# Altium PCB PCB1.PcbDoc
Units mil, origin at the board's own origin, x right, y up, seen from the top; angles counter-clockwise.
Board outline 6000 x 4000 mil, 4 copper layers (Top Layer, Layer 1, Layer 2, Bottom Layer), stack 23.756 mil thick; 9 components, 27 nets, 110 pads, 0 vias.
Unrouted connection lines stored in the file: 64.
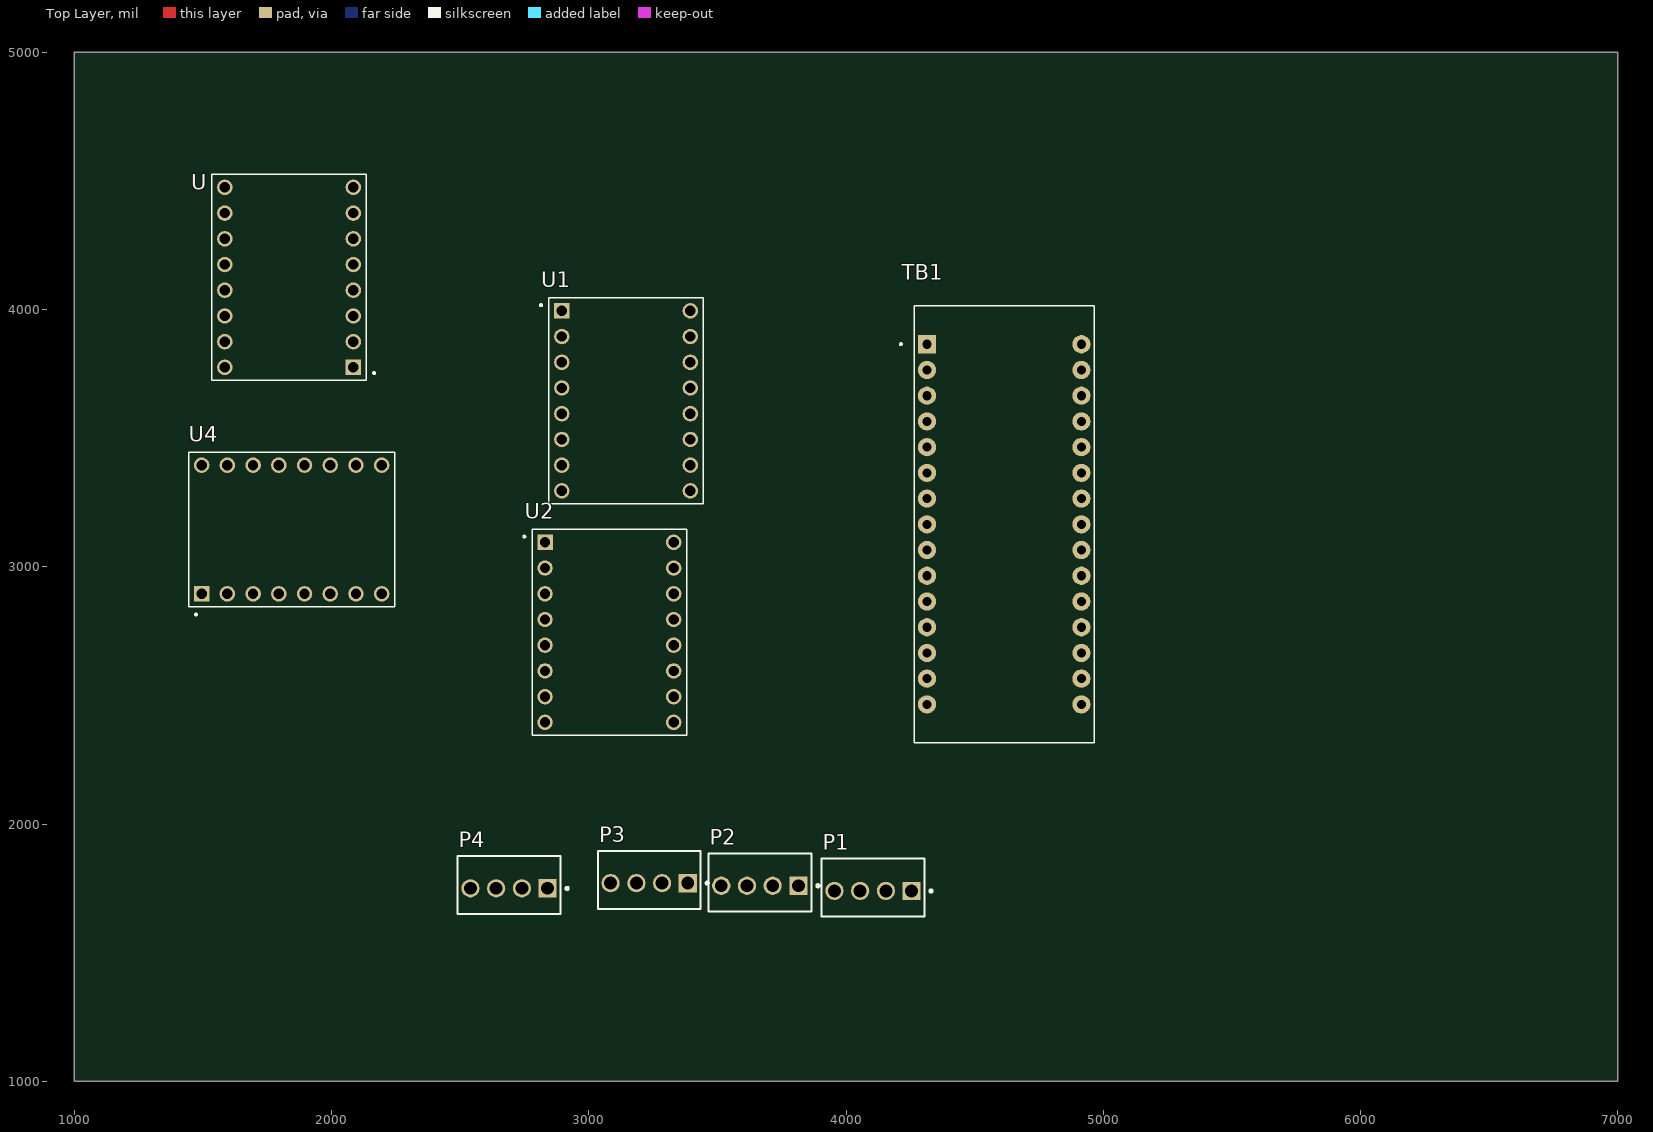
[diagram p0: Top Layer view]
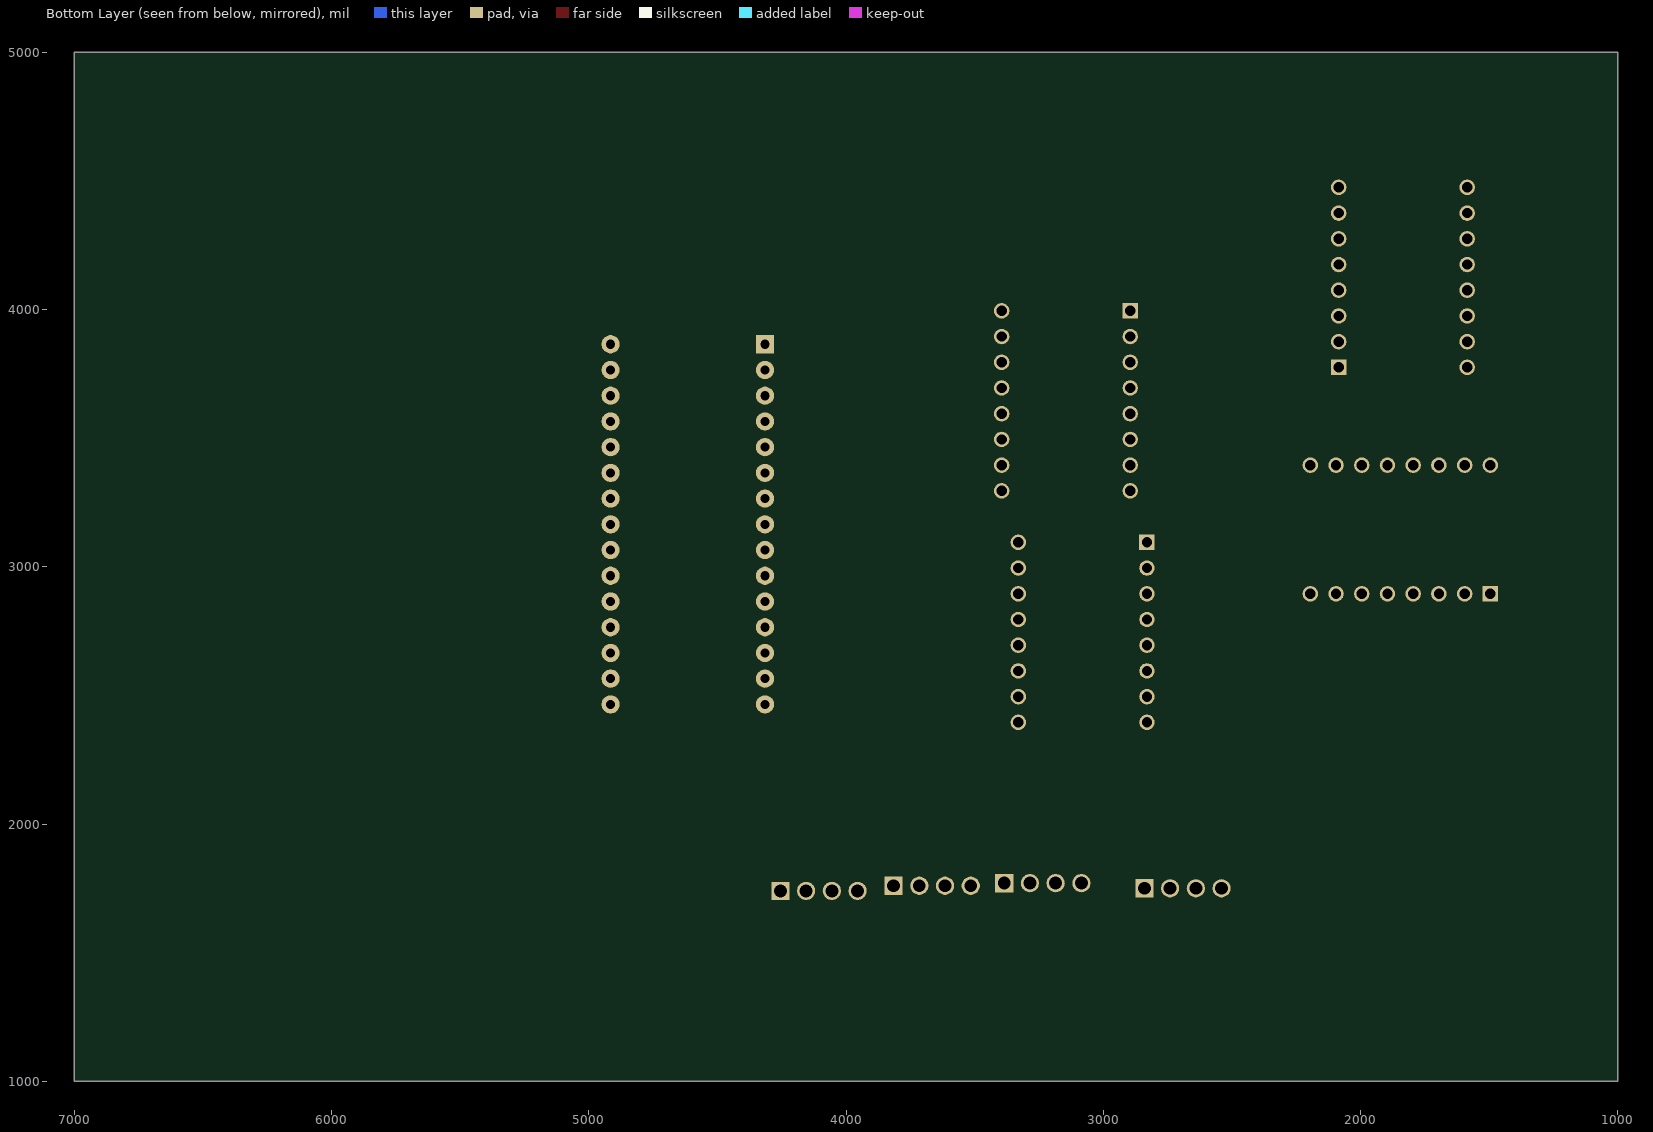
[diagram p1: Bottom Layer view, seen from below]

## Layer stack, top to bottom
Top Solder: solder mask 0.4, Solder Resist, Dk 3.5
Top Layer: signal copper 1.4
Dielectric 2: prepreg 2.8, PP-006, Dk 4.1
Layer 1: signal copper 1.378
Dielectric 1: dielectric 12.6, FR-4, Dk 4.8
Layer 2: signal copper 1.378
Dielectric 3: prepreg 2.8, PP-006, Dk 4.1
Bottom Layer: signal copper 1.4
Bottom Solder: solder mask 0.4, Solder Resist, Dk 3.5

## Board outline
1000,1000 7000,1000 7000,5000 1000,5000

## Design rules (kind name [scope] priority, off if disabled: settings)
Clearance [All] p1: gap=10 ignorepadtopadclearanceinfootprint=FALSE
PolygonConnect [All] p1: connectstyle=Relief reliefconductorwidth=10 reliefentries=4 polygonreliefangle="90 Angle" airgapwidth=10
RoutingVias [All] p1: holewidth=28 width=50 viastyle="Through Hole" minholewidth=28 minwidth=50 maxholewidth=28 maxwidth=50
SolderMaskExpansion [All] p1: expansion=4 istentingtop=FALSE
SupplyNets "Schematic Supply Nets_2" [InNet('+12')] p1: voltage=0.000
SupplyNets "Schematic Supply Nets_1" [InNet('+5')] p2: voltage=0.000
SupplyNets "Schematic Supply Nets" [InNet('GND')] p3: voltage=0.000
Width [All] p1: maxlimit=10 minlimit=10 preferedwidth=10
30 further rules are at their usual default settings.

## Components (designator, comment, footprint, x,y, rotation, side; value= is the part's Value field where it differs from the comment)
P1 "640456-4" TECO-640456-4 4105,1740 r0 top
P2 "640456-4" TECO-640456-4 3665,1760 r0 top
P3 "640456-4" TECO-640456-4 3235,1770 r0 top
P4 "640456-4" TECO-640456-4 2690,1750 r0 top
TB1 "ARDUINO_NANO" SHIELD_ARDUINO_NANO 4615,3165 r0 top
U "A4988_STEPPER_MOTOR_DRIVER_CARRIER_BLACK" MODULE_A4988_STEPPER_MOTOR_DRIVER_CARRIER_BLACK 1835,4125 r180 top
U1 "A4988_STEPPER_MOTOR_DRIVER_CARRIER_BLACK" MODULE_A4988_STEPPER_MOTOR_DRIVER_CARRIER_BLACK 3145,3645 r0 top
U2 "4988_STEPPER_MOTOR_DRIVER_CARRIER_BLACK" MODULE_A4988_STEPPER_MOTOR_DRIVER_CARRIER_BLACK 3080,2745 r0 top
U4 "A4988_STEPPER_MOTOR_DRIVER_CARRIER_BLACK" MODULE_A4988_STEPPER_MOTOR_DRIVER_CARRIER_BLACK 1845,3145 r90 top

## Footprints (in the part's own frame and the unit in brackets; to place one, negate y for a bottom-side part, rotate by r counter-clockwise, add the part's x,y. Pads: shape width x height; smd on the part's side, far side on the other; paste and mask are expansions set on the pad)
MODULE_A4988_STEPPER_MOTOR_DRIVER_CARRIER_BLACK [mm]
  rect 1.53x1.53 hole 1.02: 1(-6.35,8.89)
  round 1.53 hole 1.02: 2(-6.35,6.35) 3(-6.35,3.81) 4(-6.35,1.27) 5(-6.35,-1.27) 6(-6.35,-3.81) 7(-6.35,-6.35) 8(-6.35,-8.89) 9(6.35,-8.89) 10(6.35,-6.35) 11(6.35,-3.81) 12(6.35,-1.27) 13(6.35,1.27) 14(6.35,3.81) 15(6.35,6.35) 16(6.35,8.89)
  silkscreen extent -8.5,-10.16 7.62,10.16
SHIELD_ARDUINO_NANO [mm]
  rect 1.8x1.8 / inner round 1.8 / far side rect 1.8x1.8 hole 0.9: 1(-7.62,17.78)
  round 1.8 hole 0.9: 2(-7.62,15.24) 3(-7.62,12.7) 4(-7.62,10.16) 5(-7.62,7.62) 6(-7.62,5.08) 7(-7.62,2.54) 8(-7.62,0) 9(-7.62,-2.54) 10(-7.62,-5.08) 11(-7.62,-7.62) 12(-7.62,-10.16) 13(-7.62,-12.7) 14(-7.62,-15.24) 15(-7.62,-17.78) 16(7.62,-17.78) 17(7.62,-15.24) 18(7.62,-12.7) 19(7.62,-10.16) 20(7.62,-7.62) 21(7.62,-5.08) 22(7.62,-2.54) 23(7.62,0) 24(7.62,2.54) 25(7.62,5.08) 26(7.62,7.62) 27(7.62,10.16) 28(7.62,12.7) 29(7.62,15.24) 30(7.62,17.78)
  silkscreen extent -10.3,-21.59 8.89,21.59, body extent -9,-21.6 9,23.4, height 12.6
TECO-640456-4 [mm] "Through Hole, 4-Leads, Body 10.16x5.72mm, Pitch 2.54mm"
  rect 1.8x1.8 hole 1.27 paste-2539.97: 1(3.81,0)
  round 1.8 hole 1.27 paste-2539.97: 2(1.27,0) 3(-1.27,0) 4(-3.81,0)
  silkscreen extent -5.08,-2.54 5.86,3.18, body extent -5.08,-2.54 5.08,3.18, height 10.03

## Part data
P1 P2 P3 P4: library part CMP-2000-05419-1, "Male Header, Pitch 2.54 mm, 1 x 4 Position, Height 10.03 mm, Tail Length 3.56 mm, RoHS, Bulk", Color=White, Current, Rating="5 /  / A", Flammability Rating=UL94V-0, Manufacturer="TE Connectivity", Temperature, Operating="-55to+105 /  / degC", Voltage, Rating="250 /  / V", Agency Approvals=CSA,UL, Angle=Straight, Brand/Series=MTA-100Series, Color, Housing=White, Connector Type=MTA-100, Contact Centerline Spacing="0.100 /  / in.", Contact Mating Area Plating=Tin, Contact Plating=Tin, Contact Shape=Square, Contact Termination Area Plating=Tin, Datasheet URL=https://datasheet.ciiva.com/16286/eng-ds-82056-mta-0608-16286228.pdf, Datasheet Version=Dec-14, Length, Overall="0.4 /  / \"", Length, Pin="0.14 /  / \"", Length, Terminal Post="0.14 /  / in.", Manufacturer URL=http://www.te.com/, Material, Contact=CopperAlloy, Material, Housing=Polyester, Mount Angle=Vertical, Mounting Hole Size="0.04 /  / \"", Mounting Type=PCMount, Number of Contacts=4, Number of Positions=4, Number of Rows=1, Pin Spacing="0.1 /  / \"", Primary Type=InterconnectSystem, Size, Post="0.025 /  / in.", Special Features=Pinstrip, Standards=RoHSCompliant,ELVCompliant,UL94V-0, Termination=Solder, Type=PCBPlug
TB1: "Small, complete, and breadboard-friendly board based on the ATmega328 (Arduino Nano 3.x)", Package="Non-Standard Arduino", Availability="Not in stock", Check_prices=https://www.snapeda.com/parts/Arduino%20Nano/Arduino/view-part/?ref=eda, MF=Arduino, MP="Arduino Nano", Price=None, SnapEDA_Link=https://www.snapeda.com/parts/Arduino%20Nano/Arduino/view-part/?ref=snap
U U1 U4: Package=None, Availability=Unavailable, MF=Pololu, MP="A4988 STEPPER MOTOR DRIVER CARRIER BLACK", Price=None, SnapEDA_Link=https://www.snapeda.com/parts/A4988%20STEPPER%20MOTOR%20DRIVER%20CARRIER%20BLACK/Pololu/view-part/1450050/?ref=snap
  U: BuyPart=https://www.snapeda.com/parts/A4988%20STEPPER%20MOTOR%20DRIVER%20CARRIER%20BLACK/Pololu/view-part/1450050/?ref=eda
U2: library part A4988_STEPPER_MOTOR_DRIVER_CARRIER_BLACK, Package=None, Availability=Unavailable, MF=Pololu, MP="A4988 STEPPER MOTOR DRIVER CARRIER BLACK", Price=None, SnapEDA_Link=https://www.snapeda.com/parts/A4988%20STEPPER%20MOTOR%20DRIVER%20CARRIER%20BLACK/Pololu/view-part/1450050/?ref=snap

## Nets (pads, with @x,y where several pads share a name; then routed paths per layer and width w, separated by ;. In a path a pad name is that pad's centre, name@x,y a point inside that pad or via, vN(x,y) a via of type N, cw(c..) or ccw(c..) an arc to the next point about the centre after c; other vN are vias at no path point)
+5: TB1.27 U1.2 U1.3 U1.4 U1.5 U1.6 U1.10 U2.2 U2.3 U2.4 U2.5 U2.6 U2.10 U4.2 U4.3 U4.4 U4.5 U4.6 U4.10 U.2 U.3 U.4 U.5 U.6 U.10
+12: U1.16 U2.16 U4.16 U.16
A1A: P4.1 U4.12
A1B: P4.2 U4.11
A2A: P4.3 U4.13
A2B: P4.4 U4.14
ADIR: TB1.15 U4.8
ASTEP: TB1.14 U4.7
GND: TB1.4 TB1.29 U1.1 U1.9 U1.15 U2.1 U2.9 U2.15 U4.1 U4.9 U4.15 U.1 U.9 U.15
X1A: P1.1 U1.12
X1B: P1.2 U1.11
X2A: P1.3 U1.13
X2B: P1.4 U1.14
XDIR: TB1.8 U1.8
XSTEP: TB1.7 U1.7
Y1A: P2.1 U2.12
Y1B: P2.2 U2.11
Y2A: P2.3 U2.13
Y2B: P2.4 U2.14
YDIR: TB1.6 U2.8
YSTEP: TB1.5 U2.7
Z1A: P3.1 U.12
Z1B: P3.2 U.11
Z2A: P3.3 U.13
Z2B: P3.4 U.14
ZDIR: TB1.1 U.8
ZSTEP: TB1.2 U.7
pads on no net: TB1.3 TB1.9 TB1.10 TB1.11 TB1.12 TB1.13 TB1.16 TB1.17 TB1.18 TB1.19 TB1.20 TB1.21 TB1.22 TB1.23 TB1.24 TB1.25 TB1.26 TB1.28 TB1.30